# EAGLE board LBSS (EAGLE 9.6.2)
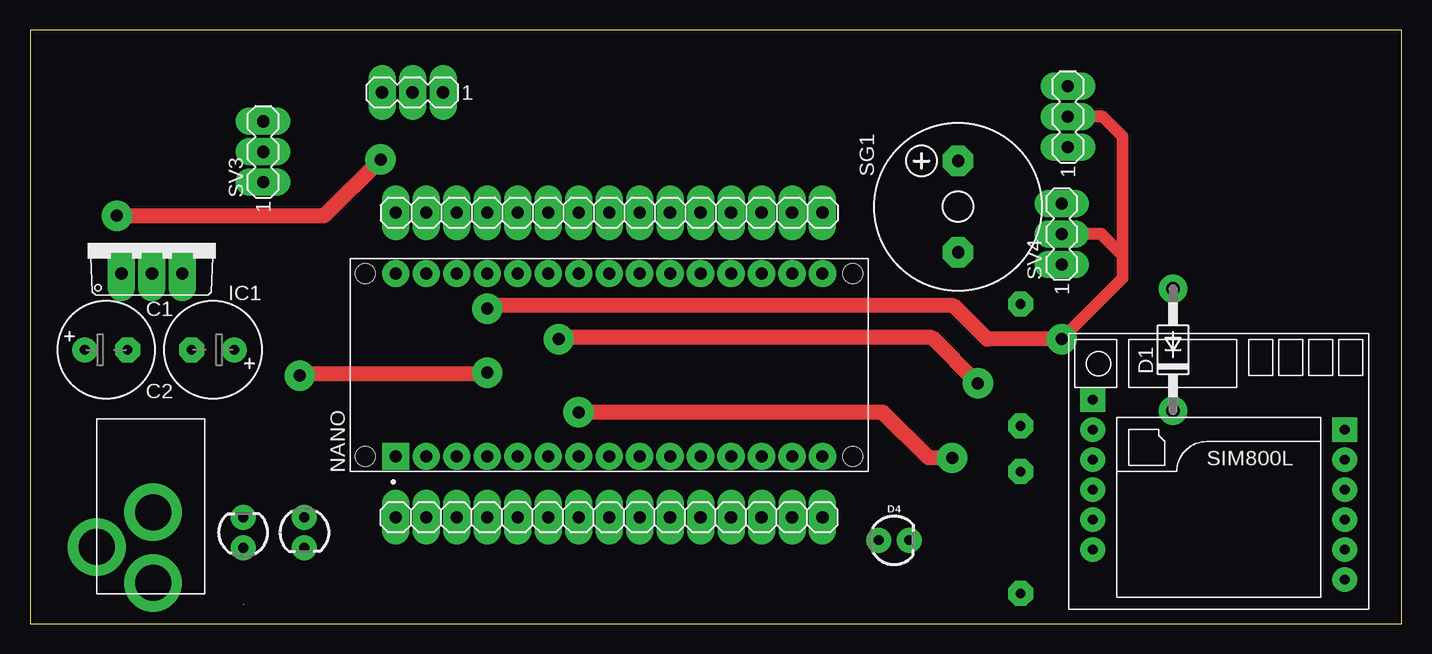
[diagram p0: board, top side]
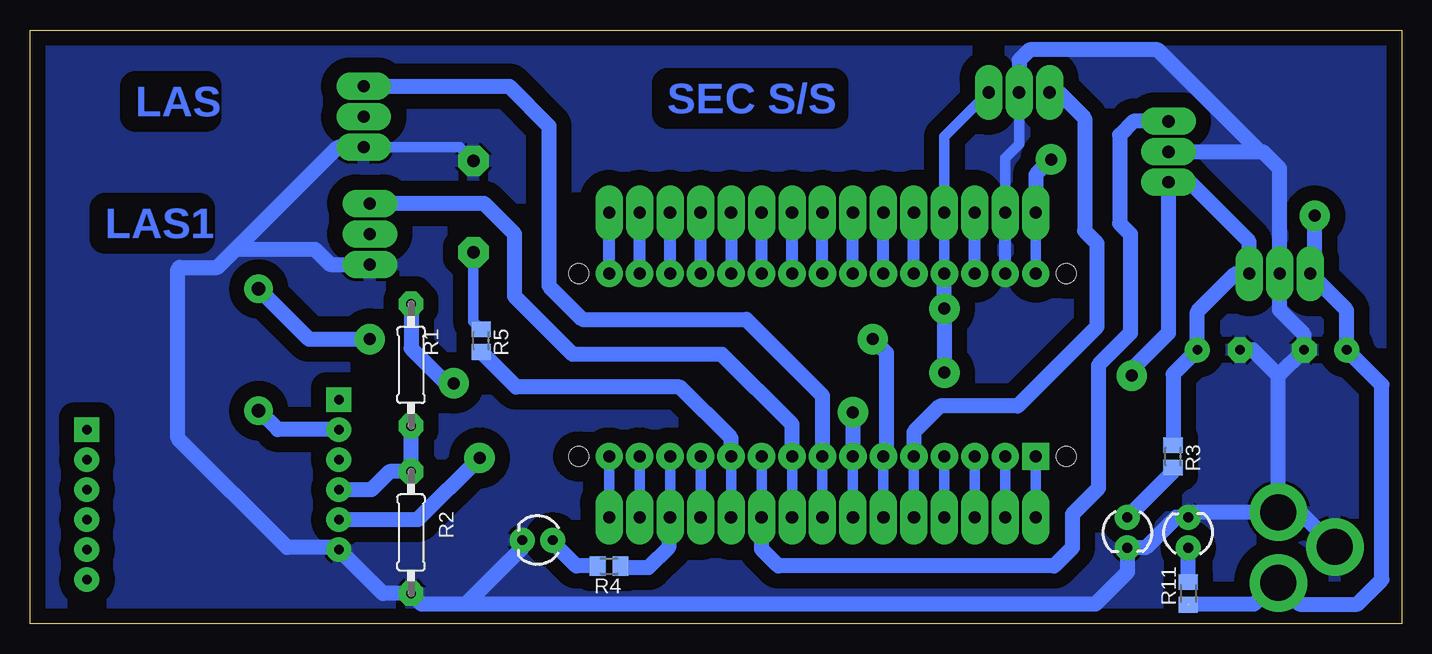
[diagram p1: board, bottom side, seen from below]

Size 114.3 x 49.53 mm. Coordinates in mm from the lower left corner, seen from the top.
Outline: 0,0 114.3,0 114.3,49.53 0,49.53 0,0
Copper layers (1*16): Top 0.035mm / dielectric 1.5mm / Bottom 0.035mm
Design rules "default *": minimum track width 40mil, minimum drill 1mm, track to track 6mil, track to pad 6mil, pad to pad 6mil, via to via 6mil, smd to smd 6mil, copper to edge 40mil, drill to drill 6mil, minimum pad ring 25mil, minimum via ring 30mil, stop-mask expansion 4mil, vias tented up to drill 0mil, thermal gap 10mil

## Footprints (pad centres in the part's own frame; a part is rotated, then mirrored left to right if it is on the bottom)
E3,5-8 = drill 0.813 pad 1.6: + -1.778,0 | drill 0.813 pad 1.6 octagon: - 1.778,0
DO41-10 = drill 1.118 pad 1.93: A 5.08,0; C -5.08,0
LED_3MM = drill 0.813 pad 1.88: A -1.27,0; K 1.27,0
TO220V = drill 1.016 long: 1 -2.54,-2.54; 2 0,-2.54; 3 2.54,-2.54
1X15 = drill 1.016 long: 1 -17.78,0; 2 -15.24,0; 3 -12.7,0; 4 -10.16,0; 5 -7.62,0; 6 -5.08,0; 7 -2.54,0; 8 0,0; 9 2.54,0; 10 5.08,0; 11 7.62,0; 12 10.16,0; 13 12.7,0; 14 15.24,0; 15 17.78,0
MODULE_A000005 = drill 1 square: 1 -7.62,17.78 | drill 1: 2 -7.62,15.24; 3 -7.62,12.7; 4 -7.62,10.16; 5 -7.62,7.62; 6 -7.62,5.08; 7 -7.62,2.54; 8 -7.62,0; 9 -7.62,-2.54; 10 -7.62,-5.08; 11 -7.62,-7.62; 12 -7.62,-10.16; 13 -7.62,-12.7; 14 -7.62,-15.24; 15 -7.62,-17.78; 16 7.62,-17.78; 17 7.62,-15.24; 18 7.62,-12.7; 19 7.62,-10.16; 20 7.62,-7.62; 21 7.62,-5.08; 22 7.62,-2.54; 23 7.62,0; 24 7.62,2.54; 25 7.62,5.08; 26 7.62,7.62; 27 7.62,10.16; 28 7.62,12.7; 29 7.62,15.24; 30 7.62,17.78 | hole 1.651: -7.62,-20.32; 7.62,-20.32; -7.62,20.32; 7.62,20.32
0207/10 = drill 0.813 octagon: 1 -5.08,0; 2 5.08,0
M0805 = smd 1.3 x 1.6: 1 -0.95,0; 2 0.95,0
F/CM12P = drill 1.016 pad 2.54 octagon: + 3.81,0; - -3.81,0
MA03-1 = drill 1.016 long: 1 -2.54,0; 2 0,0; 3 2.54,0
SIM800LMODULE = drill 0.8: DTR 10.5,1; GND -10.5,-6.5; MIC+ 10.5,-1.5; MIC- 10.5,-4; RST -10.5,1; RX -10.5,-1.5; SPK+ 10.5,-6.5; SPK- 10.5,-9; TX -10.5,-4; VCC -10.5,3.5 | drill 0.8 square: NET -10.5,6; RING 10.5,3.5
PJ-102A = drill 3 pad 4.8: RING 0.1,-3.39; RING_SW -4.6,-6.29; TIP 0.1,-9.29

## Placement (x,y rotation side)
C1  [E3,5-8]  6.35,22.86 0 top
C2  [E3,5-8]  15.24,22.86 180 top
D1  1N4004  [DO41-10]  95.25,22.86 90 top
D2  [LED_3MM]  22.86,7.62 270 top
D3  [LED_3MM]  17.78,7.62 90 top
D4  [LED_3MM]  72.01,6.99 0 top
IC1  7805TV  [TO220V]  10.16,31.75 0 top
JP1  [1X15]  48.26,34.29 0 top
JP2  [1X15]  48.26,8.89 180 top
NANO  A000005  [MODULE_A000005]  48.26,21.59 90 top
R1  1.8k  [0207/10]  82.55,21.59 90 bottom
R2  5k  [0207/10]  82.55,7.62 90 bottom
R3  1k  [M0805]  19.05,13.97 270 bottom
R4  1k  [M0805]  66.04,4.83 180 bottom
R5  1k  [M0805]  76.71,23.62 270 bottom
R11  1k  [M0805]  17.78,2.54 90 bottom
SG1  F/CM12P  [F/CM12P]  77.34,34.8 90 top
SV1  [MA03-1]  31.88,44.32 180 top
SV2  [MA03-1]  86.49,42.29 90 top
SV3  [MA03-1]  19.43,39.37 90 top
SV4  [MA03-1]  85.98,32.51 90 top
U$1  SIM800LMODULE  [SIM800LMODULE]  99.06,12.7 0 top
U$3  2.1MMJACKTHM  [PJ-102A]  10.16,12.7 0 top

## Library data of the parts
C1 C2 D1 JP1 JP2 R3-R5 R11 U$3 = adafruit
D2-D4 = SparkFun-LED; PROD_ID: DIO-08794
IC1 = linear
NANO = A000005; AVAILABILITY: Good; DESCRIPTION: ATmega328 Arduino Nano AVR® ATmega AVR MCU 8-Bit Embedded Evaluation Board; MF: Arduino; MP: A000005; PACKAGE: None; PRICE: None; PURCHASE-URL: https://pricing.snapeda.com/search/part/A000005/?ref=eda
R1 R2 = rcl; SPICEPREFIX: R
SG1 = buzzer; OC_FARNELL: unknown; OC_NEWARK: unknown
SV1-SV4 = con-lstb; OC_FARNELL: unknown; OC_NEWARK: unknown
U$1 = SIM800LMODULE

## Nets
3V3: JP1.14 NANO.17
4V1: D1.C U$1.VCC
5V: C2.+ D1.A IC1.3 JP1.4 NANO.27 R3.1 SV1.1 SV2.2 SV3.1 SV4.2
9_IN: C1.+ IC1.1 JP1.1 NANO.30 R11.1 U$3.TIP
A0: JP1.12 NANO.19
A1: JP1.11 NANO.20
A2: JP1.10 NANO.21
A3: JP1.9 NANO.22
A6: JP1.6 NANO.25
A7: JP1.5 NANO.26
AREF: JP1.13 NANO.18
BUZZER: JP2.5 NANO.11 R5.2
D0: JP2.15 NANO.1
D1: JP2.14 NANO.2
D9: JP2.4 NANO.12
DETECT: JP2.11 NANO.5 SV1.3
DETECT1: JP2.6 NANO.10 SV3.3
GND: C1.- C2.- D2.K D3.K D4.K IC1.2 JP1.2 NANO.29 R2.1 SG1.+ SV1.2 SV2.1 SV3.2 SV4.1 U$1.GND U$3.RING U$3.RING_SW
GND_1: JP2.12 NANO.4
LASER: JP2.8 NANO.8 SV2.3
LASER1: JP2.7 NANO.9 SV4.3
LED: JP2.3 NANO.13 R4.1
MISO: JP2.1 NANO.15
MOSI: JP2.2 NANO.14
N$1: U$1.NET
N$2: D3.A R11.2
N$3: U$1.RST
N$4: R1.1 R2.2 U$1.RX
N$5: D2.A R3.2
N$6: R5.1 SG1.-
N$7: U$1.RING
N$8: U$1.DTR
N$9: U$1.MIC+
N$10: U$1.MIC-
N$11: U$1.SPK+
N$12: U$1.SPK-
N$13: D4.A R4.2
RESET_1: JP2.13 NANO.3
RESET_2: JP1.3 NANO.28
RX_GSM: JP2.10 NANO.6 R1.2
SCK: JP1.15 NANO.16
SCL: JP1.7 NANO.24
SDA: JP1.8 NANO.23
TX_GSM: JP2.9 NANO.7 U$1.TX

## Tracks (layer width: path | path; a pad name or v marks a point on that pad's centre or on a via)
3V3
  Bottom 1.016: NANO.17 JP1.14
4V1
  Bottom 1.27: U$1.VCC 93.67,16.2 D1.C
5V  (via drill 1)
  Top 1.016: v85.98,23.75 91.06,28.83 91.06,30.73 | 91.06,30.73 89.28,32.51 SV4.2 | 91.06,30.73 91.06,40.64 89.41,42.29 SV2.2
  Top 1.27: v85.98,23.75 79.76,23.75 76.96,26.54 38.35,26.54 v38.1,26.29 | v38.1,20.95 37.97,20.83 22.61,20.83 v22.48,20.7
  Bottom 0.889: SV1.1 38.1,40.64 JP1.4 NANO.27
  Bottom 1.27: R3.1 19.05,20.83 C2.+ 17.02,26.04 13.84,29.21 IC1.3 12.7,31.88 17.65,36.83 SV3.1 19.43,24.26 22.48,21.21 v22.48,20.7 | D1.A 91.06,23.75 v85.98,23.75 | NANO.27 v38.1,26.29 v38.1,20.95
9_IN  (via drill 1)  (1 unrouted)
  Top 1.27: v7.24,34.04 24.51,34.04 v29.21,38.73
  Bottom 0.889: JP1.1 NANO.30
  Bottom 1.27: 17.78,1.65 12.32,1.65 10.56,3.41 U$3.TIP 8.5,1.65 3.68,1.65 1.65,3.68 1.65,19.94 C1.+ 4.57,26.16 IC1.1 7.24,29.59 v7.24,34.04 | v29.21,38.73 30.48,37.47 JP1.1
A0
  Bottom 1.016: NANO.19 JP1.12
A1
  Bottom 1.016: JP1.11 NANO.20
A2
  Bottom 1.016: NANO.21 JP1.10
A3
  Bottom 1.016: NANO.22 JP1.9
A6
  Bottom 1.016: NANO.25 JP1.6
A7
  Bottom 1.016: NANO.26 JP1.5
AREF
  Bottom 1.016: NANO.18 JP1.13
BUZZER
  Bottom 0.889: JP2.5 NANO.11
  Bottom 1.27: NANO.11 55.88,15.49 60.13,19.75 73.78,19.75 R5.2
D0
  Bottom 0.889: JP2.15 NANO.1
D1
  Bottom 0.889: JP2.14 NANO.2
D9
  Bottom 0.889: JP2.4 NANO.12
DETECT
  Bottom 0.889: JP2.11 NANO.5
  Bottom 1.27: NANO.5 40.64,16 38.48,18.16 32,18.16 25.4,24.77 25.4,31.75 26.42,32.77 26.42,42.16 28.57,44.32 SV1.3
DETECT1
  Bottom 0.889: JP2.6 NANO.10
  Bottom 1.27: SV3.3 22.35,41.91 23.5,40.77 23.5,33.4 22.61,32.51 22.61,24.26 25.27,21.59 25.27,11.3 27.43,9.14 27.43,6.35 28.96,4.83 51.94,4.83 53.34,6.22 JP2.6
GND
  Bottom 0.889: SV1.2 31.88,40.01 33.02,38.86 JP1.2 | SG1.+ 78.49,39.75 SV2.1
  Bottom 1.016: NANO.29 JP1.2
  Bottom 1.27: U$3.RING_SW 8.46,9.31 U$3.RING | U$3.RING 17.36,9.31 D3.K 18.8,8.89 21.34,6.35 D2.K 22.86,4.32 25.53,1.65 78.49,1.65 | U$3.RING 10.26,20.73 | 10.26,20.73 C1.- 8.13,24.13 10.16,26.16 IC1.2 10.16,37.97 11.56,39.37 11.81,39.37 | 10.26,20.73 12.39,22.86 C2.- | SV3.2 11.81,39.37 | 11.81,39.37 20.32,47.88 30.99,47.88 31.88,46.99 SV1.2 | D4.K 73.28,6.35 77.98,1.65 81.66,1.65 82.19,2.18 82.55,2.18 | R2.1 84.9,2.54 U$1.GND 88.73,6.37 92.87,6.37 101.98,15.48 101.98,29.59 101.85,29.72 98.68,29.72 97.16,31.24 | 97.16,31.24 90.55,31.24 89.28,29.97 SV4.1 | 97.16,31.24 88.65,39.75 SV2.1 85.85,39.75
  pour Bottom (isolate 1.27): -0.13,49.4 -0.13,0 114.17,0 114.17,49.53 0,49.53 -0.13,49.53 0,49.4
GND_1
  Bottom 0.889: JP2.12 NANO.4
LASER
  Bottom 0.889: JP2.8 NANO.8
  Bottom 1.27: SV2.3 74.36,44.83 71.06,41.53 71.06,28.18 68.27,25.4 54.61,25.4 48.26,19.05 NANO.8
LASER1
  Bottom 0.889: JP2.7 NANO.9
  Bottom 1.27: NANO.9 50.8,16.64 56.64,22.48 69.09,22.48 73.91,27.3 73.91,32.51 76.45,35.05 SV4.3
LED
  Bottom 0.889: JP2.3 NANO.13
  Bottom 1.27: JP2.3 61.09,8.76 61.09,6.35 62.74,4.7 64.96,4.7 R4.1
MISO
  Bottom 0.889: NANO.15 JP2.1
MOSI
  Bottom 0.889: NANO.14 JP2.2
N$2
  Bottom 1.27: R11.2 D3.A
N$4
  Bottom 1.27: U$1.RX 88.54,11.18 85.85,11.18 84.33,12.7 R2.2 R1.1
N$5
  Bottom 1.27: D2.A 19.05,12.7 R3.2
N$6
  Bottom 0.889: SG1.- 77.34,25.21 R5.1
N$13
  Bottom 1.27: R4.2 68.77,4.83 70.74,6.8 D4.A
RESET_1
  Bottom 0.889: JP2.13 NANO.3
RESET_2
  Bottom 1.016: NANO.28 JP1.3
RX_GSM  (via drill 1)
  Top 1.27: v78.99,20.07 75.18,23.88 44.2,23.88 v44.07,23.75
  Bottom 0.889: JP2.10 NANO.6
  Bottom 1.27: R1.2 82.55,22.99 79.63,20.07 v78.99,20.07 | v44.07,23.75 42.93,22.61 42.93,14.22 NANO.6
SCK
  Bottom 1.016: NANO.16 JP1.15
SCL
  Bottom 1.016: NANO.24 JP1.7
SDA
  Bottom 1.016: NANO.23 JP1.8
TX_GSM  (via drill 1)
  Top 1.27: v76.83,13.84 74.88,13.84 71.07,17.65 v45.72,17.65
  Bottom 0.889: JP2.9 NANO.7
  Bottom 1.27: U$1.TX 81.98,8.7 v76.83,13.84 | v45.72,17.65 NANO.7

## Text on the board
Bottom: SEC S/S | LAS | LAS1